# Altium PCB MainPCB.PcbDoc (part 2 of 2)
Units mm, origin at the board's own origin, x right, y up, seen from the top; angles counter-clockwise.
Board outline 53.21 x 33.91 mm, 4 copper layers (Top Layer, Ground, Power, Bottom Layer), stack 0.603 mm thick; 43 components, 63 nets, 250 pads, 105 vias.
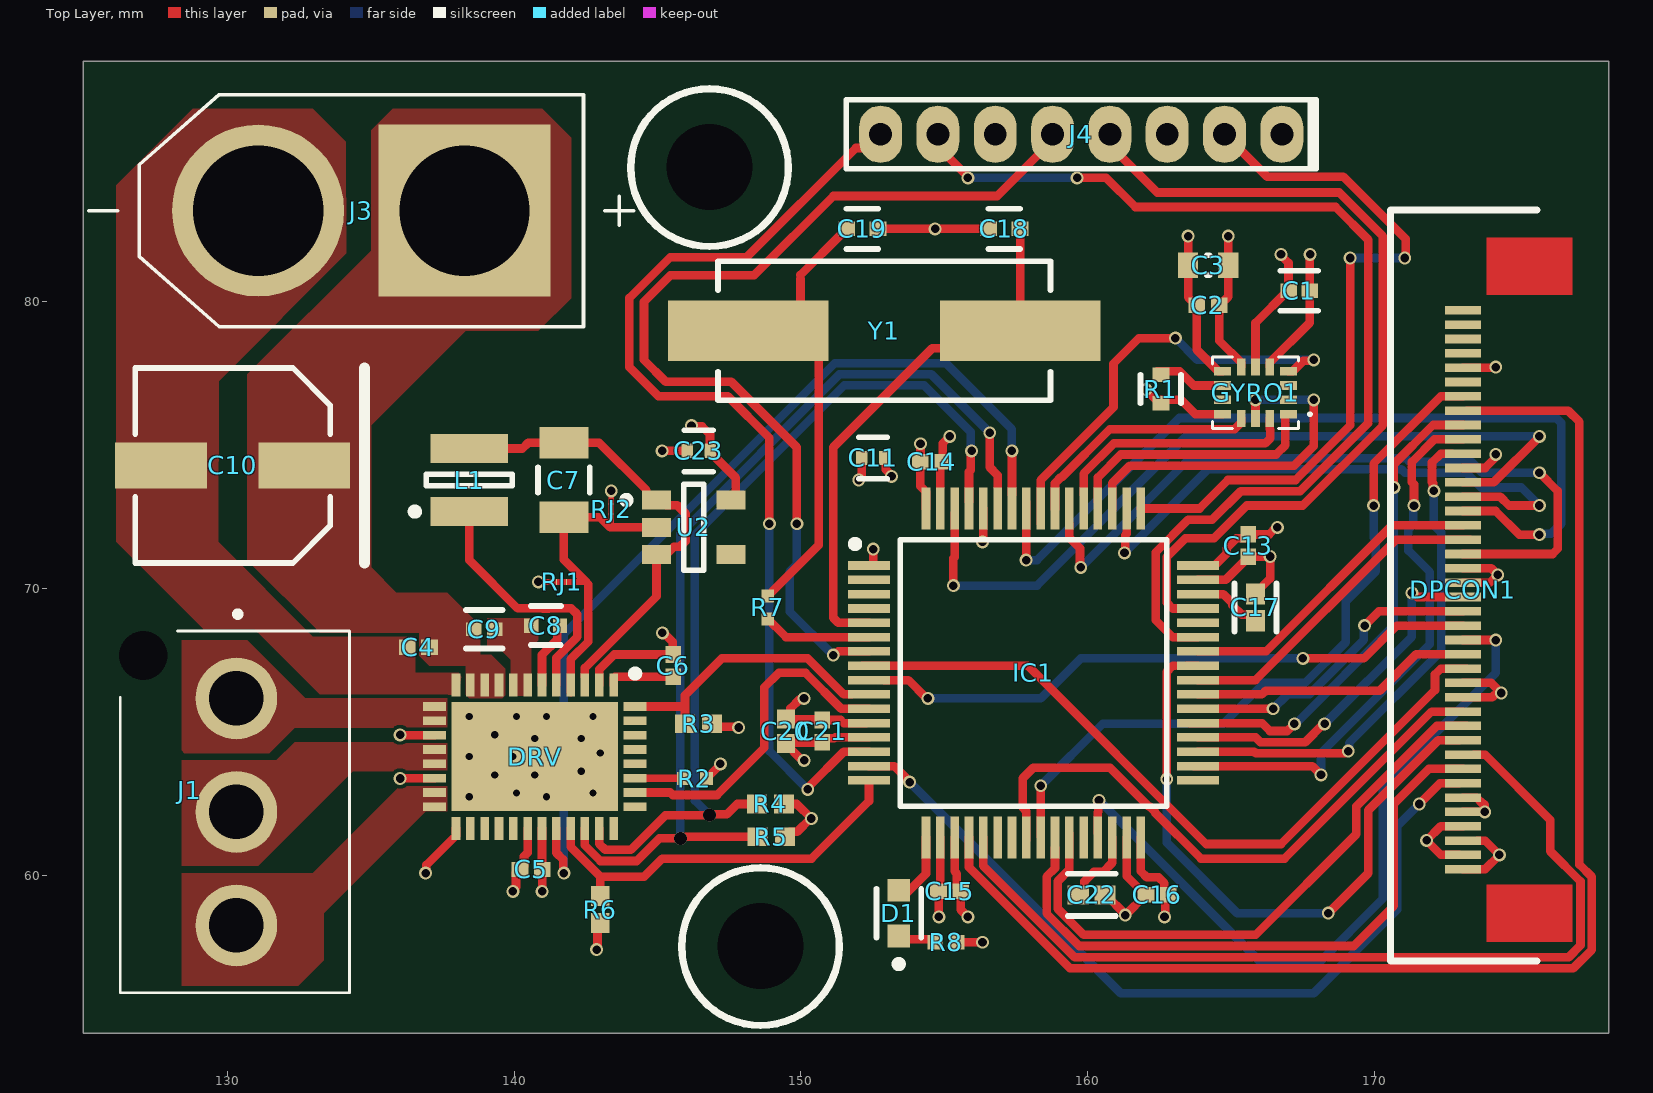
[diagram p0: Top Layer view]

## Polygon pours and split planes (outlines as drawn) (continued)
3V3 on Power "3V3_L03_P016" (solid, pour order 16): 144.272,87.122 144.272,77.47 142.621,75.819 142.621,72.39 144.907,70.104 146.939,70.104 148.844,68.199 148.844,59.817 154.178,54.483 176.276,54.483 178.181,56.388 178.181,86.741 176.53,88.392 145.542,88.392
AVDD on Power "AVDD_L03_P015" (solid, pour order 15): 138.303,71.374 141.478,71.374 143.637,69.215 146.177,69.215 148.336,67.056 148.336,60.198 144.399,56.261 139.954,56.261 138.049,58.166 138.049,67.437 136.779,68.707 136.779,69.85
VM on Power "VM_L03_P014" (solid, pour order 14): 142.113,88.392 126.619,88.392 124.968,86.741 124.968,56.642 127.127,54.483 136.652,54.483 137.795,55.626 137.795,66.802 135.636,68.961 135.636,75.565 137.033,76.962 141.478,76.962 143.383,78.867 143.383,87.122

## Silkscreen, mask and mechanical layers (free items; w line width, h text height)
Top Overlay:
  circle w0.254: c148.592,57.508 r2.75
  circle w0.254: c146.814,84.686 r2.75